# Altium PCB UARC_Sensor_Cedric.PcbDoc
Units mm, origin at the board's own origin, x right, y up, seen from the top; angles counter-clockwise.
Board outline 60.1 x 84.97 mm, 4 copper layers (Top Layer, GND Plane, PWR Plane, Bottom Layer), stack 1.495 mm thick; 89 components, 77 nets, 394 pads, 19 vias.
Unrouted connection lines stored in the file: 193.
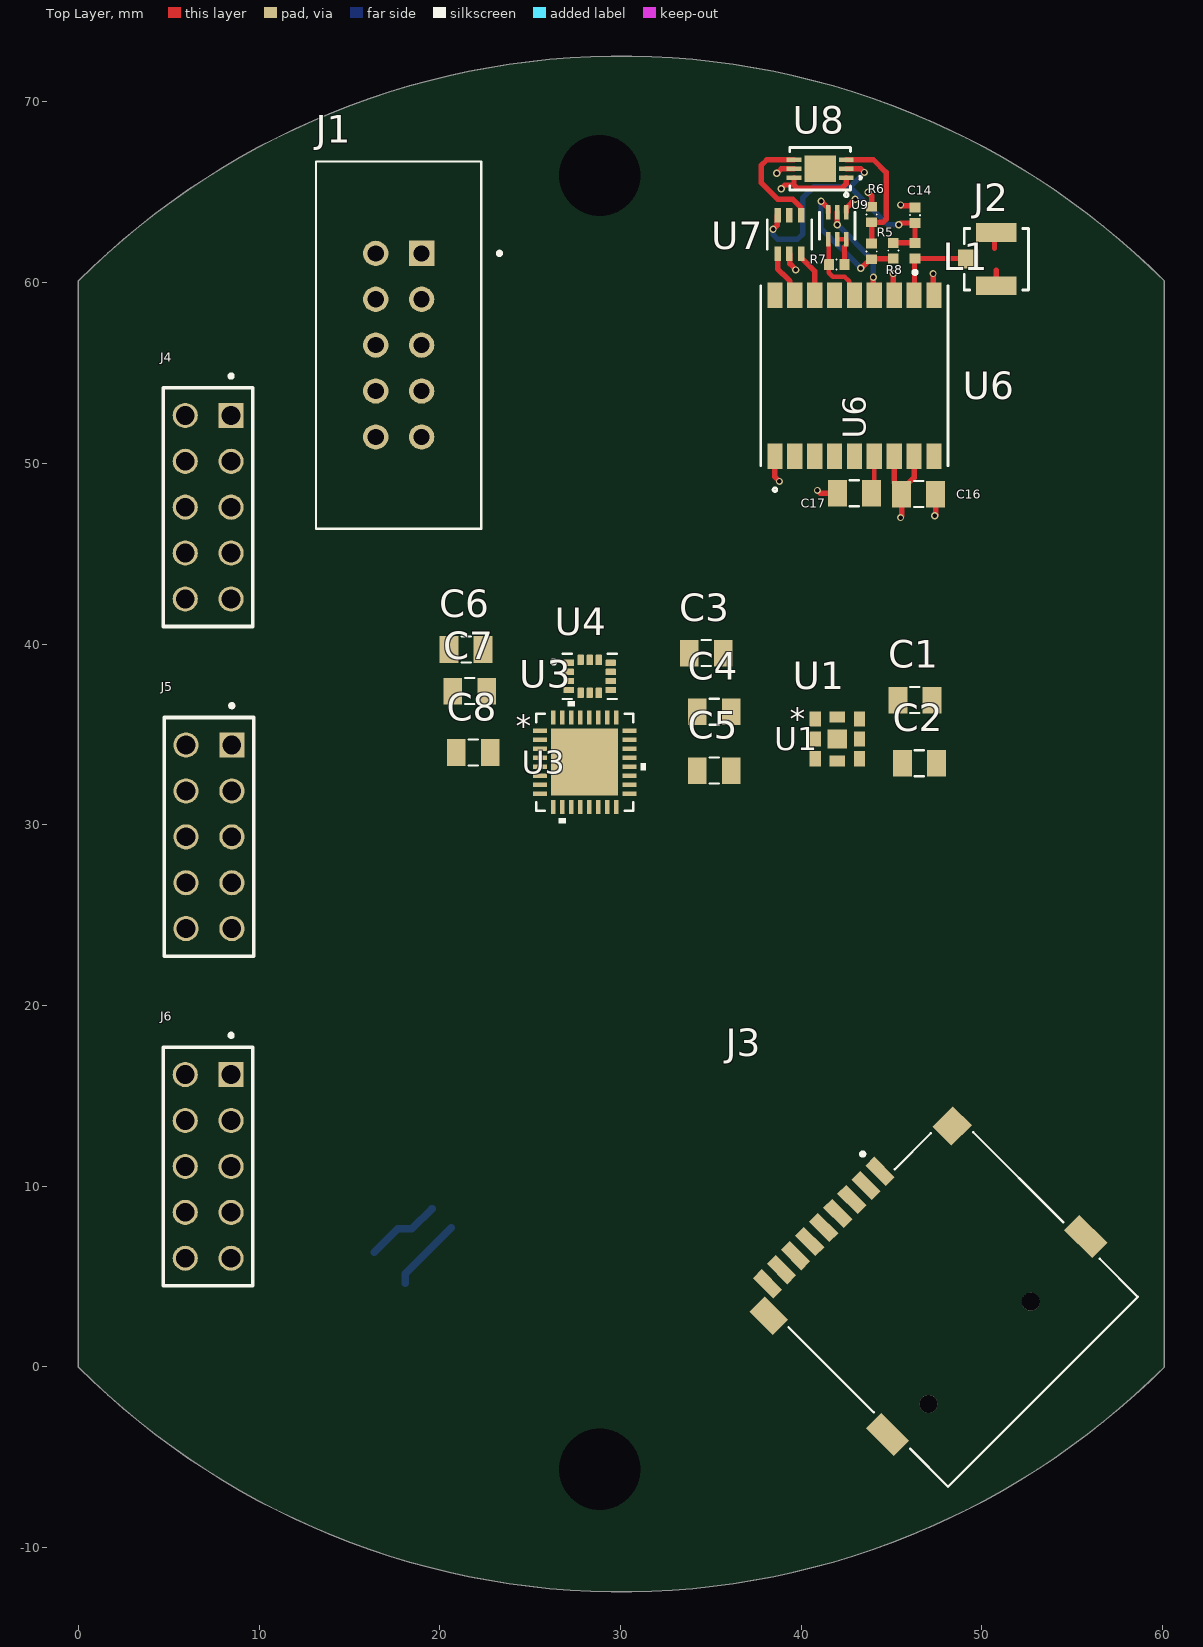
[diagram p0: Top Layer view]
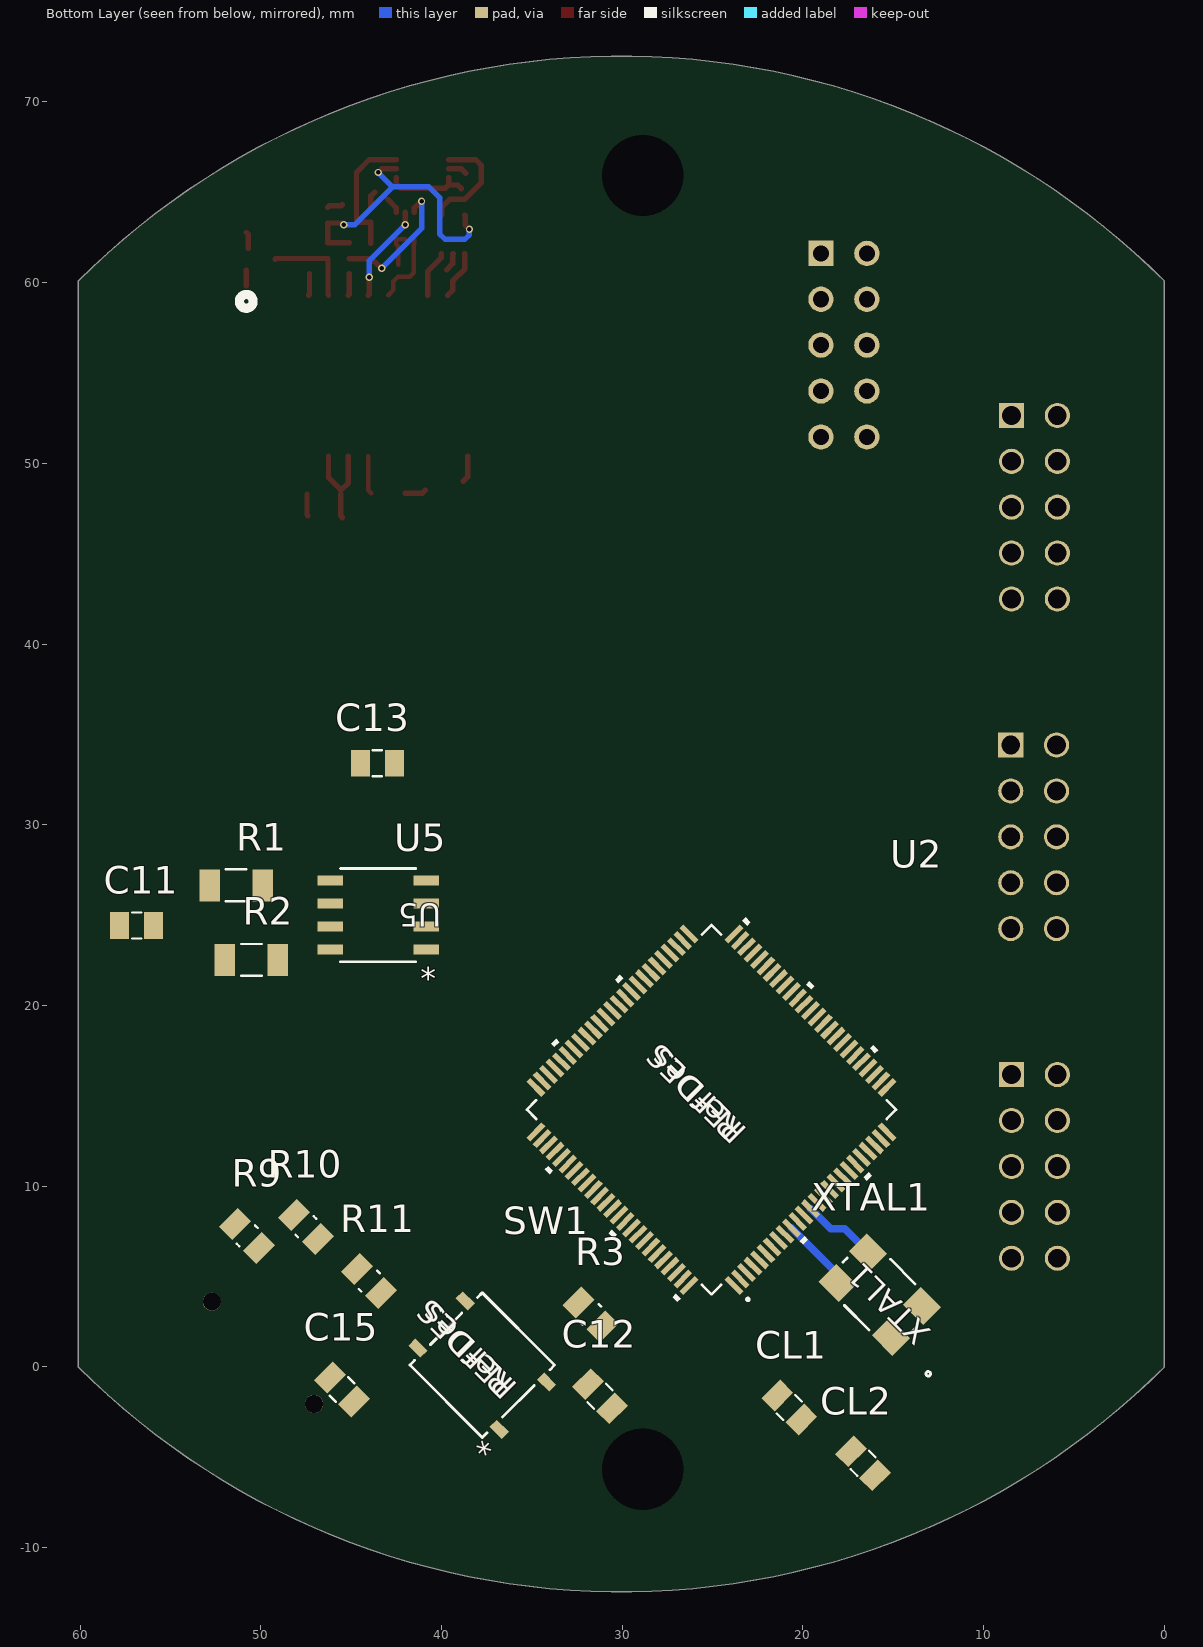
[diagram p1: Bottom Layer view, seen from below]
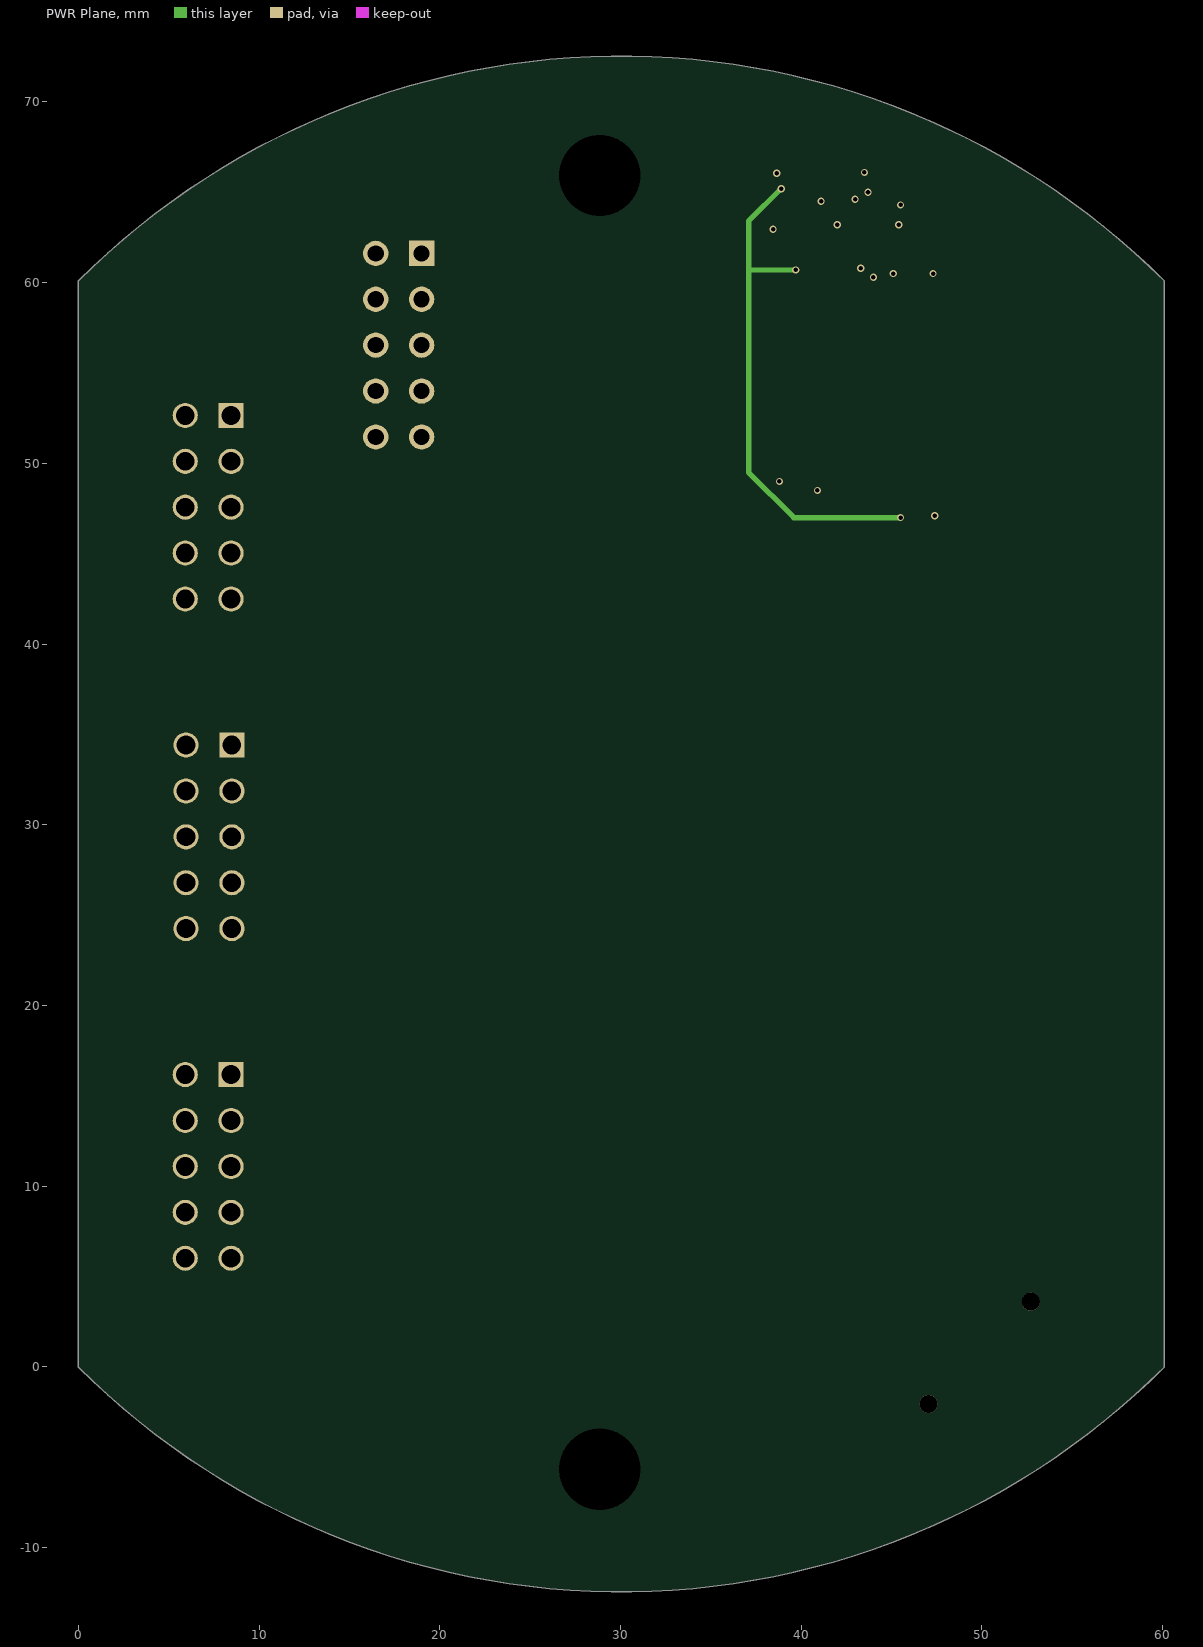
[diagram p2: PWR Plane]

## Layer stack, top to bottom
Top Solder: solder mask 0.0102, Solder Resist, Dk 3.5
Top Layer: signal copper 0.0875
Dielectric 2: prepreg 0.13, PP-017, Dk 4.45
Dielectric 4: prepreg 0.13, PP-017, Dk 4.45
GND Plane: signal copper 0.105
Core: core 0.59, Core-038, Dk 4.6
PWR Plane: signal copper 0.105
Dielectric 5: prepreg 0.13, PP-017, Dk 4.45
Dielectric 3: prepreg 0.13, PP-017, Dk 4.45
Bottom Layer: signal copper 0.0875
Bottom Solder: solder mask 0.0102, Solder Resist, Dk 3.5

## Board outline
-0.005,-0.001 ccw(c30.048,30.051) 60.1,-0.001 60.1,60.085 ccw(c30.047,30.033) -0.005,60.085

## Design rules (kind name [scope] priority, off if disabled: settings)
Clearance [All] p1: gap=0.2 ignorepadtopadclearanceinfootprint=FALSE
PolygonConnect [All] p1: connectstyle=Relief reliefconductorwidth=0.254 reliefentries=4 polygonreliefangle="90 Angle" airgapwidth=0.254
RoutingVias [All] p1: holewidth=0.711 width=1.27 viastyle="Through Hole" minholewidth=0.711 minwidth=1.27 maxholewidth=0.711 maxwidth=1.27
SolderMaskExpansion [All] p1: expansion=0.102 istentingtop=FALSE
SupplyNets "Schematic Supply Nets_33" [InNet('SWDIO')] p1: voltage=0.000
SupplyNets "Schematic Supply Nets_32" [InNet('OVP')] p2: voltage=0.000
SupplyNets "Schematic Supply Nets_31" [InNet('CS2')] p3: voltage=0.000
SupplyNets "Schematic Supply Nets_30" [InNet('SPI_MOSI')] p4: voltage=0.000
SupplyNets "Schematic Supply Nets_29" [InNet('GPIO1')] p5: voltage=0.000
SupplyNets "Schematic Supply Nets_28" [InNet('GPIO5')] p6: voltage=0.000
SupplyNets "Schematic Supply Nets_27" [InNet('USART2_RX')] p7: voltage=0.000
SupplyNets "Schematic Supply Nets_26" [InNet('5V')] p8: voltage=0.000
SupplyNets "Schematic Supply Nets_25" [InNet('OCP')] p9: voltage=0.000
SupplyNets "Schematic Supply Nets_24" [InNet('V_BCKP')] p10: voltage=0.000
SupplyNets "Schematic Supply Nets_23" [InNet('5V_ISO')] p11: voltage=0.000
SupplyNets "Schematic Supply Nets_22" [InNet('GND')] p12: voltage=0.000
SupplyNets "Schematic Supply Nets_21" [InNet('VDD')] p13: voltage=0.000
SupplyNets "Schematic Supply Nets_20" [InNet('I2C_SDA')] p14: voltage=0.000
SupplyNets "Schematic Supply Nets_19" [InNet('GPIO4')] p15: voltage=0.000
SupplyNets "Schematic Supply Nets_18" [InNet('SPI_MISO')] p16: voltage=0.000
SupplyNets "Schematic Supply Nets_17" [InNet('SWO')] p17: voltage=0.000
SupplyNets "Schematic Supply Nets_16" [InNet('SPI_CLK')] p18: voltage=0.000
SupplyNets "Schematic Supply Nets_15" [InNet('FIRE')] p19: voltage=0.000
SupplyNets "Schematic Supply Nets_14" [InNet('USART2_TX')] p20: voltage=0.000
SupplyNets "Schematic Supply Nets_13" [InNet('RESET')] p21: voltage=0.000
SupplyNets "Schematic Supply Nets_12" [InNet('ARM')] p22: voltage=0.000
SupplyNets "Schematic Supply Nets_11" [InNet('I2C_SCL')] p23: voltage=0.000
SupplyNets "Schematic Supply Nets_10" [InNet('GPIO6')] p24: voltage=0.000
SupplyNets "Schematic Supply Nets_9" [InNet('CS1')] p25: voltage=0.000
SupplyNets "Schematic Supply Nets_8" [InNet('USART1_RX')] p26: voltage=0.000
SupplyNets "Schematic Supply Nets_7" [InNet('GPIO3')] p27: voltage=0.000
SupplyNets "Schematic Supply Nets_6" [InNet('ERR')] p28: voltage=0.000
SupplyNets "Schematic Supply Nets_5" [InNet('GPIO2')] p29: voltage=0.000
SupplyNets "Schematic Supply Nets_4" [InNet('GPIO7')] p30: voltage=0.000
SupplyNets "Schematic Supply Nets_3" [InNet('SWDCLK')] p31: voltage=0.000
SupplyNets "Schematic Supply Nets_2" [InNet('GPIO0')] p32: voltage=0.000
SupplyNets "Schematic Supply Nets_1" [InNet('USART1_TX')] p33: voltage=0.000
SupplyNets "Schematic Supply Nets" [InNet('CS0')] p34: voltage=0.000
Width [All] p1: maxlimit=0.3 minlimit=0.2 preferedwidth=0.25
30 further rules are at their usual default settings.

## Components (designator, comment, footprint, x,y, rotation, side; value= is the part's Value field where it differs from the comment)
3V3 "Test Point" "Test Point Pad Large" 69.374,-35.825 r90 top
5V "Test Point" "Test Point Pad Large" 109.872,-28.25 r0 top
ACCL_CS "Test Point" "Test Point Pad Large" 70.038,-11.425 r90 top
BMP_CS "Test Point" "Test Point Pad Large" 77.817,-20.175 r90 top
BT "BK-912" BAT_BK-912 -20.25,25.75 r180 top
C1 "100nF" CAPACITOR_0805_2012M-70N 46.3,36.9 r0 top
C2 "100nF" CAPACITOR_0805_2012M-70N 46.544,33.406 r0 top
C3 "100nF" CAPACITOR_0805_2012M-70N 34.75,39.5 r0 top
C4 "100nF" CAPACITOR_0805_2012M-70N 35.19,36.25 r0 top
C5 "10uF" CAPACITOR_0805_2012M-70N 35.19,33 r0 top
C6 "10nF" CAPACITOR_0805_2012M-70N 21.46,39.7 r0 top
C7 "100nF" CAPACITOR_0805_2012M-70N 21.66,37.4 r0 top
C8 "2.2uF" CAPACITOR_0805_2012M-70N 21.86,34 r0 top
C9 "2.2uF" CAPACITOR_0805_2012M-70N 130.595,77.775 r0 top
C10 "2.2uF" CAPACITOR_0805_2012M-70N 130.988,74.177 r0 top
C11 "4.7nF" CAPACITOR_0805_2012M-70N 56.867,24.425 r0 bottom
C12 "100nF" CAPACITOR_0805_2012M-70N 31.227,-1.625 r45 bottom
C13 "100nF" CAPACITOR_0805_2012M-70N 43.542,33.4 r0 bottom
C14 "10nF" CAPACITOR_0402_1005M_55N 46.3,63.732 r270 top
C15 "100nF" CAPACITOR_0805_2012M-70N 45.5,-1.25 r45 bottom
C16 "100nF" CAPACITOR_0805_2012M-70N 46.5,48.3 r180 top
C17 "100nF" CAPACITOR_0805_2012M-70N 42.95,48.35 r0 top
C18 "100nF" CAPACITOR_0805_2012M-70N 123.545,99.25 r0 top
C19 "100nF" CAPACITOR_0805_2012M-70N 127.57,99.275 r0 top
C20 "100nF" CAPACITOR_0805_2012M-70N 130.645,99.275 r90 top
C21 "100nF" CAPACITOR_0805_2012M-70N 133.63,99.125 r0 top
C22 "100nF" CAPACITOR_0805_2012M-70N 122.57,94.675 r90 top
C23 "100nF" CAPACITOR_0805_2012M-70N 125.57,94.66 r90 top
C24 "4.7uF" CAPACITOR_0603_1608M_100N 129.045,94.516 r90 top
C25 "100nF" CAPACITOR_0805_2012M-70N 133.345,94.6 r90 top
C26 "1uF" CAPACITOR_0805_2012M-70N 125.37,79.075 r90 top
C27 "100nF" CAPACITOR_0805_2012M-70N 125.662,73.602 r90 top
CAN_H "Test Point" "Test Point Pad Large" 86.9,-35.825 r90 top
CAN_L "Test Point" "Test Point Pad Large" 121.323,-28.25 r90 top
CAN_RX "Test Point" "Test Point Pad Large" 81.946,-28.25 r90 top
CAN_TX "Test Point" "Test Point Pad Large" 88.243,-20.175 r90 top
CL1 "27pF" CAPACITOR_0805_2012M-70N 20.75,-2.25 r45 bottom
CL2 "27pF" CAPACITOR_0805_2012M-70N 16.665,-5.335 r45 bottom
D1 "SML-D12U1WT86" LED_SML-D12U1WT86 -61.78,-44.425 r0 top
D2 "SML-D12U1WT86" LED_SML-D12U1WT86 -49.23,-44.525 r0 top
D3 "SML-D12U1WT86" LED_SML-D12U1WT86 -36.03,-43.8 r0 top
D4 "SML-D12U1WT86" LED_SML-D12U1WT86 -22.055,-43.55 r0 top
D5 "SML-D12U1WT86" LED_SML-D12U1WT86 -9.08,-43.675 r0 top
GND "Test Point" "Test Point Pad Large" 69.22,-28.25 r90 top
GND1 "Test Point" "Test Point Pad Large" 70.967,-20.175 r90 top
GND2 "Test Point" "Test Point Pad Large" 81.964,-11.425 r90 top
GNSS_ANT_DETECT "Test Point" "Test Point Pad Large" 123.191,-11.425 r90 top
GNSS_GND "Test Point" "Test Point Pad Large" 98.668,-20.175 r90 top
GNSS_RX "Test Point" "Test Point Pad Large" 92.347,-28.25 r90 top
GNSS_TX "Test Point" "Test Point Pad Large" 130.198,-28.25 r90 top
IMU_CS "Test Point" "Test Point Pad Large" 113.04,-11.425 r90 top
J1 "103308-1" TE_103308-1 17.73,56.54 r270 top
J2 "RECE.20279.001E.01" CON3_RECE.20279.001E.01_TAL 50.8,61.3 r270 top
J3 "MSD-1-A" CUI_MSD-1-A 48.25,3.75 r45 top
J4 "SSW-105-02-G-D" SAMTEC_SSW-105-02-G-D 8.457,52.653 r90 top locked
J5 "SSW-105-02-G-D" SAMTEC_SSW-105-02-G-D 8.497,34.413 r90 top locked
J6 "SSW-105-02-G-D" SAMTEC_SSW-105-02-G-D 8.457,16.173 r90 top locked
L1 "27nH" INDC1005X55N 46.3,61.768 r270 top
MISO "Test Point" "Test Point Pad Large" 114.198,-28.25 r90 top
MOSI "Test Point" "Test Point Pad Large" 75.071,-28.25 r90 top
R1 "60" RESISTOR_1206_3216M_55N 51.362,26.65 r0 bottom
R2 "60" RESISTOR_1206_3216M_55N 50.517,22.525 r0 bottom
R3 "10k" Resistor_0805_2012M-50N 31.742,2.9 r45 bottom
R4 "10k" Resistor_0805_2012M-50N 144.535,49.175 r0 top
R5 "560" RESISTOR_0402_1005M_37N 43.9,61.732 r270 top
R6 "100k" RESISTOR_0402_1005M_37N 43.9,63.768 r270 top
R7 "100k" RESISTOR_0402_1005M_37N 41.968,61 r0 top
R8 "10" RESISTOR_0402_1005M_37N 45.1,61.768 r90 top
R9 "=Value" RESISTOR_0805_2012M-50N 50.75,7.25 r45 bottom
R10 "=Value" RESISTOR_0805_2012M-50N 47.5,7.75 r45 bottom
R11 "=Value" RESISTOR_0805_2012M-50N 44,4.75 r45 bottom
R12 "1k" Resistor_0805_2012M-50N -62.23,-41.075 r0 top
R13 "1k" Resistor_0805_2012M-50N -49.33,-40.15 r0 top
R14 "1k" Resistor_0805_2012M-50N -37.04,-40.2 r0 top
R15 "1k" Resistor_0805_2012M-50N -22.38,-40.325 r0 top
R16 "1k" Resistor_0805_2012M-50N -10.47,-39.825 r0 top
SPI_CLK "Test Point" "Test Point Pad Large" 75.2,-35.825 r90 top
SW1 "PTS526 SM15 SMTR2 LFS" "SON4_PTS526 SM15 SMTR2 LFS_CNK" 37.742,0.1 r45 bottom
U1 "BMP585" LGA9_BMP585_BOS 42,34.75 r0 top
U2 "STM32F407VGT7" LQFP100-14x14mm 25.055,14.234 r45 bottom
U3 "ADXL314WBCPZ-RL" LFCSP32_CP-32-17_ADI 28.023,33.46 r0 top
U4 "ICM-42370-P" PQFN50P250X300X81-14N 28.3,38.21 r0 top
U5 "MCP2557FD-H/SN" SOIC8_SN_MCH 43.5,25 r0 bottom
U6 "MAX-M10M-00B" MOD18_MAX-M10M_UBL 42.95,54.85 r90 top
U7 "NC7WZ07P6X" SC-88SC70-6SOT-363_419B-02_ONS 39.35,62.667 r270 top
U8 "LT6000CDCB#TRPBF" DFN-6_DCB_LIT 41.052,66.3 r180 top
U9 "SI1016X-T1-GE3" SOT_X-T1-GE3_VIS 42,63.149 r270 top
VCC_RF "Test Point" "Test Point Pad Large" 95.801,-35.825 r90 top
XTAL1 "FY0800018" "4xtal- 1-3xtal 2-4NC_DIO" 15.75,4 r45 bottom

## Footprints (in the part's own frame and the unit in brackets; to place one, negate y for a bottom-side part, rotate by r counter-clockwise, add the part's x,y. Pads: shape width x height; smd on the part's side, far side on the other; paste and mask are expansions set on the pad)
"4xtal- 1-3xtal 2-4NC_DIO" [mm]
  rect 1.6x1.397 smd paste-0.699 mask+0: 1(-2.1,1.2) 2(2.1,1.2) 3(2.1,-1.2) 4(-2.1,-1.2)
  silkscreen extent -5.13,-1.8 2.71,1.8, body extent -2.58,-1.68 2.58,1.68, height 0.79
BAT_BK-912 [mm]
  round 17.78 smd paste-10: 1(0,0)
  rect 2.79x5.08 smd: S1(-10.985,0) S1(10.985,0)
  silkscreen extent -10.54,-7.62 10.54,7.62
CAPACITOR_0402_1005M_55N [mm] "Capacitor, 0402 (1005 metric), 0.55mm height, nominal pads"
  rect 0.54x0.6 smd mask+0.051: 1(-0.432,0) 2(0.432,0)
  silkscreen extent -0.01,-0.28 0.01,0.28, body extent -0.5,-0.28 0.5,0.27, height 0.48
CAPACITOR_0603_1608M_100N [mm] "Capacitor, 0603 (1608 metric), 1mm high, nominal pads"
  rect 1x1.02 smd mask+0.051: 1(-0.759,0) 2(0.759,0)
  silkscreen extent -0.1,-0.5 0.1,0.5, body extent -0.8,-0.5 0.8,0.5, height 0.78
CAPACITOR_0805_2012M-70N [mm] "Capacitor, 0805 (2012 metric), 0.7mm high, nominal pads,"
  rect 1.04x1.47 smd mask+0.051: 1(-0.94,0) 2(0.94,0)
  silkscreen extent -0.25,-0.72 0.25,0.72, body extent -1,-0.73 1,0.73, height 1.23
CON3_RECE.20279.001E.01_TAL [mil]
  rect 41x45 smd paste+0 mask+0: 1(0,-61.02)
  rect 41x89 smd paste+0 mask+0: 2(58.07,0) 3(-58.07,0)
  silkscreen extent -67,-70 67,70
CUI_MSD-1-A [mm]
  rect 0.7x1.6 smd: 1(2.25,7.75) 2(1.15,7.75) 3(0.05,7.75) 4(-1.05,7.75) 5(-2.15,7.75) 6(-3.25,7.75) 7(-4.35,7.75) 8(-5.45,7.75) CD(-6.55,7.75)
  rect 1.2x1.8 smd: G1(-7.75,6.45)
  rect 1.6x1.5 smd: G2(6.85,6.7)
  rect 1.2x2.2 smd: G3(-7.75,-2.85) G4(7.75,-2.85)
  round 1 hole 1 unplated: ""(-4.95,-3.25) ""(3.05,-3.25)
  silkscreen extent -7.42,-7.25 7.42,9.2, body extent -8.28,-6.25 7.87,8.79, height 1.8
DFN-6_DCB_LIT [mil]
  rect 32x10 smd paste+0 mask+0: 1(-57,19.68) 2(-57,0) 3(-57,-19.69) 4(57,-19.69) 5(57,0) 6(57,19.68)
  rect 69x57 smd paste+0 mask+0: 7(0,0)
  silkscreen extent -90,-47 66,47, body extent -61,-41 61,41, height 32
INDC1005X55N [mm]
  rect 0.54x0.6 smd: 1(-0.432,0) 2(0.432,0)
  silkscreen extent 1.1,-0.1 1.3,0.1
LED_SML-D12U1WT86 [mm]
  rect 0.8x0.8 smd: A(0.825,0) C(-0.825,0)
  silkscreen extent -1.86,-0.4 0.11,0.4, body extent -0.8,-0.4 0.8,0.4, height 0.55
LFCSP32_CP-32-17_ADI [mil]
  rect 30x10 smd paste+0 mask+0: 1(-97.5,68.9) 2(-97.5,49.21) 3(-97.5,29.53) 4(-97.5,9.84) 5(-97.5,-9.84) 6(-97.5,-29.53) 7(-97.5,-49.21) 8(-97.5,-68.9) 17(97.5,-68.9) 18(97.5,-49.21) 19(97.5,-29.53) 20(97.5,-9.84) 21(97.5,9.84) 22(97.5,29.53) 23(97.5,49.21) 24(97.5,68.9)
  rect 10x30 smd paste+0 mask+0: 9(-68.9,-97.5) 10(-49.21,-97.5) 11(-29.53,-97.5) 12(-9.84,-97.5) 13(9.84,-97.5) 14(29.53,-97.5) 15(49.21,-97.5) 16(68.9,-97.5) 25(68.9,97.5) 26(49.21,97.5) 27(29.53,97.5) 28(9.84,97.5) 29(-9.84,97.5) 30(-29.53,97.5) 31(-49.21,97.5) 32(-68.9,97.5)
  rect 146x146 smd paste-73 mask+0: 33(0,0)
  silkscreen extent -106,-132 132,132, body extent -101,-101 101,101, height 61
LGA9_BMP585_BOS [mil]
  rect 24x33 smd paste+0 mask+0: 1(-48,43.31) 2(-48,0) 3(-48,-43.31) 5(48,-43.31) 6(48,0) 7(48,43.31)
  rect 33x24 smd paste+0 mask+0: 4(0,-48) 8(0,48)
  rect 42x42 smd paste+0 mask+0: 9(0,0)
  body extent -65,-65 65,65, height 77
LQFP100-14x14mm [mil]
  rect 47x12 smd paste+0 mask+0: 1(-305.12,236.22) 2(-305.12,216.54) 3(-305.12,196.85) 4(-305.12,177.17) 5(-305.12,157.48) 6(-305.12,137.8) 7(-305.12,118.11) 8(-305.12,98.43) 9(-305.12,78.74) 10(-305.12,59.06) 11(-305.12,39.37) 12(-305.12,19.69) 13(-305.12,0) 14(-305.12,-19.69) 15(-305.12,-39.37) 16(-305.12,-59.06) 17(-305.12,-78.74) 18(-305.12,-98.43) 19(-305.12,-118.11) 20(-305.12,-137.8) 21(-305.12,-157.48) 22(-305.12,-177.17) 23(-305.12,-196.85) 24(-305.12,-216.54) 25(-305.12,-236.22) 51(305.12,-236.22) 52(305.12,-216.54) 53(305.12,-196.85) 54(305.12,-177.17) 55(305.12,-157.48) 56(305.12,-137.8) 57(305.12,-118.11) 58(305.12,-98.43) 59(305.12,-78.74) 60(305.12,-59.06) 61(305.12,-39.37) 62(305.12,-19.69) 63(305.12,0) 64(305.12,19.69) 65(305.12,39.37) 66(305.12,59.06) 67(305.12,78.74) 68(305.12,98.43) 69(305.12,118.11) 70(305.12,137.8) 71(305.12,157.48) 72(305.12,177.17) 73(305.12,196.85) 74(305.12,216.54) 75(305.12,236.22)
  rect 12x47 smd paste+0 mask+0: 26(-236.22,-305.12) 27(-216.54,-305.12) 28(-196.85,-305.12) 29(-177.17,-305.12) 30(-157.48,-305.12) 31(-137.8,-305.12) 32(-118.11,-305.12) 33(-98.43,-305.12) 34(-78.74,-305.12) 35(-59.06,-305.12) 36(-39.37,-305.12) 37(-19.69,-305.12) 38(0,-305.12) 39(19.69,-305.12) 40(39.37,-305.12) 41(59.06,-305.12) 42(78.74,-305.12) 43(98.43,-305.12) 44(118.11,-305.12) 45(137.8,-305.12) 46(157.48,-305.12) 47(177.17,-305.12) 48(196.85,-305.12) 49(216.54,-305.12) 50(236.22,-305.12) 76(236.22,305.12) 77(216.54,305.12) 78(196.85,305.12) 79(177.17,305.12) 80(157.48,305.12) 81(137.8,305.12) 82(118.11,305.12) 83(98.43,305.12) 84(78.74,305.12) 85(59.06,305.12) 86(39.37,305.12) 87(19.69,305.12) 88(0,305.12) 89(-19.69,305.12) 90(-39.37,305.12) 91(-59.06,305.12) 92(-78.74,305.12) 93(-98.43,305.12) 94(-118.11,305.12) 95(-137.8,305.12) 96(-157.48,305.12) 97(-177.17,305.12) 98(-196.85,305.12) 99(-216.54,305.12) 100(-236.22,305.12)
  silkscreen extent -351,-349 349,349, body extent -315,-315 315,315, height 63
MOD18_MAX-M10M_UBL [mil]
  rect 55x33 smd paste+0 mask+0: 1(-175.5,173.23) 2(-175.5,129.92) 3(-175.5,86.61) 4(-175.5,43.31) 5(-175.5,0) 6(-175.5,-43.31) 7(-175.5,-86.61) 8(-175.5,-129.92) 9(-175.5,-173.23) 10(175.5,-173.23) 11(175.5,-129.92) 12(175.5,-86.61) 13(175.5,-43.31) 14(175.5,0) 15(175.5,43.31) 16(175.5,86.61) 17(175.5,129.92) 18(175.5,173.23)
  silkscreen extent -252,-204 196,204, body extent -191,-199 191,199, height 106
PQFN50P250X300X81-14N [mm]
  rrect14% 0.58x0.35 smd mask+0: 1(-1.16,0.75)
  rrect25% 0.58x0.35 smd mask+0: 2(-1.16,0.25) 3(-1.16,-0.25) 4(-1.16,-0.75) 8(1.16,-0.75) 9(1.16,-0.25) 10(1.16,0.25) 11(1.16,0.75)
  rrect25% 0.35x0.58 smd mask+0: 5(-0.5,-0.91) 6(0,-0.91) 7(0.5,-0.91) 12(0.5,0.91) 13(0,0.91) 14(-0.5,0.91)
  silkscreen extent -2.1,-1.25 1.5,1.25, body extent -1.5,-1.25 1.5,1.25, height 0.81
RESISTOR_0402_1005M_37N [mm] "Resistor, 0402 (1005 metric), 0.37mm height, nominal pads"
  rect 0.54x0.6 smd mask+0.051: 1(-0.432,0) 2(0.432,0)
  silkscreen extent -0.01,-0.28 0.01,0.28, body extent -0.5,-0.25 0.5,0.25, height 0.37
Resistor_0805_2012M-50N [mm] "Resistor, 0805 (2012 metric), nominal pads"
  rect 1.04x1.47 smd mask+0.051: 1(-0.94,0) 2(0.94,0)
  silkscreen extent -0.1,-0.72 0.1,0.72, body extent -1,-0.62 1,0.63, height 0.5
RESISTOR_0805_2012M-50N [mm] "Resistor, 0805 (2012 metric), nominal pads"
  rect 1.04x1.47 smd mask+0.051: 1(-0.94,0) 2(0.94,0)
  silkscreen extent -0.1,-0.72 0.1,0.72, body extent -1,-0.62 1,0.63, height 0.5
RESISTOR_1206_3216M_55N [mm]
  rect 1.13x1.77 smd mask+0.051: 1(-1.47,0) 2(1.47,0)
  silkscreen extent -0.58,-0.88 0.58,0.88, body extent -1.6,-0.8 1.6,0.8, height 0.65
SAMTEC_SSW-105-02-G-D [mm]
  rect 1.39x1.39 hole 1.04: 01(0,0)
  round 1.39 hole 1.04: 02(0,2.54) 03(-2.54,0) 04(-2.54,2.54) 05(-5.08,0) 06(-5.08,2.54) 07(-7.62,0) 08(-7.62,2.54) 09(-10.16,0) 10(-10.16,2.54)
  silkscreen extent -11.69,-1.21 2.27,3.75
SC-88SC70-6SOT-363_419B-02_ONS [mil]
  rect 31x14 smd paste+0 mask+0: 1(-42,25.59) 2(-42,0) 3(-42,-25.59) 4(42,-25.59) 5(42,0) 6(42,25.59)
  silkscreen extent -32,-49 32,49, body extent -44,-44 44,44, height 43
SOIC8_SN_MCH [mil]
  rect 55x22 smd paste+0 mask+0: 1(-104.5,75) 2(-104.5,25) 3(-104.5,-25) 4(-104.5,-75) 5(104.5,-75) 6(104.5,-25) 7(104.5,25) 8(104.5,75)
  silkscreen extent -82,-102 82,102, body extent -118,-96 118,96, height 69
"SON4_PTS526 SM15 SMTR2 LFS_CNK" [mm]
  rect 0.95x0.559 smd paste+0 mask+0: 1(-3.18,1.85) 2(-3.18,-1.85) 3(3.18,-1.85) 4(3.18,1.85)
  silkscreen extent -2.83,-2.83 2.83,2.83, body extent -3.3,-2.71 3.3,2.71, height 1.6
SOT_X-T1-GE3_VIS [mil]
  rect 32x10 smd paste+0 mask+0: 1(-29.5,19.69) 2(-29.5,0) 3(-29.5,-19.69) 4(29.5,-19.69) 5(29.5,0) 6(29.5,19.69)
  silkscreen extent -71,-39 30,39, body extent -34,-34 34,34, height 24
TE_103308-1 [mil]
  rect 55x55 hole 35: 1(-200,50)
  round 55 hole 35: 2(-100,50) 3(0,50) 4(100,50) 5(200,50) 6(-200,-50) 7(-100,-50) 8(0,-50) 9(100,-50) 10(200,-50)
  silkscreen extent -400,-180 400,223
"Test Point Pad Large" [mm] "Exposed copper pad, 1mm dia. Very easy to probe."
  round 1 smd paste-10 mask+0.051: 1(0,0)

## Part data
BT: "BATTERY RETAINER COIN 20MM SMD", Package=None, Availability=Unavailable, MF=MPD, MP=BK-912, Price=None, SnapEDA_Link=https://www.snapeda.com/parts/BK-912/Memory%20Protection%20Devices/view-part/4219672/?ref=snap
C1 C2 C3 C4 C7 C12 C15 C16 C17 C18 C19 C20 C21 C22 C23 C25 C27: library part GRM21BR61E226ME44L, "CUSTOM: 885012207016 0.1µF 0805 ±10% 10V X7R Ceramic Capacitor", Capacitance at Rated Voltage=10%, Package=0805, Rated Voltage=25V, Supplier 1 Part No.=490-GRM155R61J224KE01JCT-ND, Temp Range="-55°C ~ 85°C", Temperature Coefficient=X5R, Tolerance=±20%, APSS Standard Part="APSS Standard", MF Part No.=GRM21BR61E226ME44L, Supplier 1=Digikey
C5: library part GRM21BR61E226ME44L, "CUSTOM: TACR106K010XTA 10µF 0805 ±10% 10V Tantalum Capacitor", Capacitance at Rated Voltage=10%, Package=0805, Rated Voltage=25V, Supplier 1 Part No.=490-GRM155R61J224KE01JCT-ND, Temp Range="-55°C ~ 85°C", Temperature Coefficient=X5R, Tolerance=±20%, APSS Standard Part="APSS Standard", MF Part No.=GRM21BR61E226ME44L, Supplier 1=Digikey
C6: library part GRM21BR61E226ME44L, "CUSTOM: 885012207011, 10000pF 0805 ±10% 10 X7R  Ceramic Capacitor", Capacitance at Rated Voltage=10%, Package=0805, Rated Voltage=25V, Supplier 1 Part No.=490-GRM155R61J224KE01JCT-ND, Temp Range="-55°C ~ 85°C", Temperature Coefficient=X5R, Tolerance=±20%, APSS Standard Part="APSS Standard", MF Part No.=GRM21BR61E226ME44L, Supplier 1=Digikey
C8 C9 C10: library part GRM21BR61E226ME44L, "CUSTOM: GRM21BR71A225KA01L 2.2µF 0805 ±10% 10V X7R Ceramic Capacitor", Capacitance at Rated Voltage=10%, Package=0805, Rated Voltage=25V, Supplier 1 Part No.=490-GRM155R61J224KE01JCT-ND, Temp Range="-55°C ~ 85°C", Temperature Coefficient=X5R, Tolerance=±20%, APSS Standard Part="APSS Standard", MF Part No.=GRM21BR61E226ME44L, Supplier 1=Digikey
C11: library part GRM21BR61E226ME44L, "CUSTOM: CC0805KRX7R9BB472 4700pF 0805 ±10% 50V X7R Ceramic Capacitor", Capacitance at Rated Voltage=10%, Package=0805, Rated Voltage=25V, Supplier 1 Part No.=490-GRM155R61J224KE01JCT-ND, Temp Range="-55°C ~ 85°C", Temperature Coefficient=X5R, Tolerance=±20%, APSS Standard Part="APSS Standard", MF Part No.=GRM21BR61E226ME44L, Supplier 1=Digikey
C13: library part GRM21BR60J107ME15L, "CUSTOM: 885012207016 0.1µF 0805 ±10% 10V X7R Ceramic Capacitor", Capacitance at Rated Voltage=20%, Package=0805, Rated Voltage=6.3V, Supplier 1 Part No.=490-GRM155R61E225KE11JCT-ND, Temp Range="-55°C ~ 85°C", Temperature Coefficient=X5R, Tolerance=±20%, APSS Standard Part="APSS Standard", MF Part No.=GRM21BR60J107ME15L, Supplier 1=Digikey
C14: library part GRM155R61E225KE11J, "CUSTOM: GRM155R71C103KA01D, 10000pF 0402 ±10% 16V X7R Ceramic Capacitor", Capacitance at Rated Voltage=10%, Package=0402, Rated Voltage=25V, Supplier 1 Part No.=490-10749-1-ND, Temp Range="-55°C ~ 85°C", Temperature Coefficient=X5R, Tolerance=±10%, APSS Standard Part="APSS Standard", MF Part No.=GRM155R61E225KE11J, Supplier 1=Digikey
C24: library part GRM188Z71A106KA73D, "CUSTOM:  GRM188Z71A475KE15D 4.7µF 0603 ±10% 10V X7R Ceramic Capacitor", Capacitance at Rated Voltage=20%, Package=0603, Rated Voltage=10V, Supplier 1 Part No.=490-5313-1-ND, Temp Range="-55°C ~ 125°C", Temperature Coefficient=X7R, Tolerance=±10%, APSS Standard Part="APSS Standard", MF Part No.=GRM188Z71A106KA73D, Supplier 1=Digikey
C26: library part GRM21BR61E226ME44L, "CUSTOM: 0805ZC105KAT2A 1µF 0805 ±10% 10V X7R  Ceramic Capacitor", Capacitance at Rated Voltage=10%, Package=0805, Rated Voltage=25V, Supplier 1 Part No.=490-GRM155R61J224KE01JCT-ND, Temp Range="-55°C ~ 85°C", Temperature Coefficient=X5R, Tolerance=±20%, APSS Standard Part="APSS Standard", MF Part No.=GRM21BR61E226ME44L, Supplier 1=Digikey
CL1 CL2: library part GRM21BR61E226ME44L, "CUSTOM: 600F270JT250XT4K 27pF 0805 ±5% 250V C0G, NP0 Ceramic Capacitor", Capacitance at Rated Voltage=10%, Package=0805, Rated Voltage=25V, Supplier 1 Part No.=490-GRM155R61J224KE01JCT-ND, Temp Range="-55°C ~ 85°C", Temperature Coefficient=X5R, Tolerance=±20%, APSS Standard Part="APSS Standard", MF Part No.=GRM21BR61E226ME44L, Supplier 1=Digikey
D1 D2 D3 D4 D5: "Red 620nm LED Indication - Discrete 2.2V 0603 (1608 Metric)", Package="0603 Rohm", Availability="In Stock", Check_prices=https://www.snapeda.com/parts/SML-D12U1WT86/Rohm/view-part/?ref=eda, MF=Rohm, MP=SML-D12U1WT86, Price=None, Purchase-URL=https://pricing.snapeda.com/search?q=SML-D12U1WT86&ref=eda, SnapEDA_Link=https://www.snapeda.com/parts/SML-D12U1WT86/Rohm/view-part/?ref=snap
J1: "Header;  Pin;  Vertical;  Copper Alloy;  Thermoplastic;  10;  0.100 x 0.100 in.;  1 A", Package=None, Availability=Unavailable, MF="TE Connectivity", MP=103308-1, Price=None, SnapEDA_Link=https://www.snapeda.com/parts/103308-1/TE%20Connectivity%20AMP%20Connectors/view-part/519501/?ref=snap
J2: "No Description Available", Manufacturer_Name="Taoglas Limited", Copyright="Copyright (C) 2025 Ultra Librarian. All rights reserved.", Digi-Key_Part_Number_1=931-1107-1-ND, Digi-Key_Part_Number_2=931-1107-6-ND, Digi-Key_Part_Number_3=931-1107-2-ND, Manufacturer_Part_Number=RECE.20279.001E.01, RefDes=RefDes, Type="Coaxial Connectors(RF) Assemblies"
J3: "Micro SD Card Connector, 9 Positions, Connector and Ejector, Push In, Auto Eject Out, Surface Mount, 1.8 mm Height Above Board, Gold Flash", Package=None, Check_prices=https://www.snapeda.com/parts/MSD-1-A/Same+Sky/view-part/?ref=eda, MF="Same Sky", MP=MSD-1-A, SnapEDA_Link=https://www.snapeda.com/parts/MSD-1-A/Same+Sky/view-part/?ref=snap
J4 J5 J6: Package=None, Availability=Unavailable, MF="Samtec Inc.", MP=SSW-105-02-G-D, Price=None
L1: library part LQG15HH27NJ02D, "LQG15HN2N2S02D 27nH 0402  Unshielded Multilayer Inductor 350 mA 460mOhm Max", Package=None, Availability=Unavailable, MP=LQG15HH27NJ02D, Price=None
R1 R2: library part "TNPW1206xxxxDE Series", "CUSTOM: CRCW120660R0KNEAIF 60 Ohms 1206  ±10% 0.25W, 1/4W Chip Resistor,", Package=0805, Power=0.52W, Rated Voltage=200V, Temp Range="-55°C ~ 155°C", Temperature Coefficient=±200ppm/°C, Tolerance=0.5%, Value Range="1R ~ 2M", E Series=E24+E96, Supplier 1=Digikey
R3 R4: library part "RMCF0805JT Series", "CUSTOM: CRCW080510K0FKEA 10 kOhms 0805  ±1% 0.25W, 1/4W Chip Resistor", Package=0805, Power=1/8W, Rated Voltage=150V, Temp Range="-55°C ~ 155°C", Temperature Coefficient=±200ppm/°C, Tolerance=5%, Value Range="100m ~ 22M", APSS Standard Part="APSS Standard", E Series=E24, Supplier 1=Digikey
R5: library part "RMCF0402JT Series", "CUSTOM: ERJ-2GEJ561X 560 Ohms 0402  ±5% 0.1W, 1/10W Chip Resistor", Package=0402, Power=1/16W, Rated Voltage=50V, Temp Range="-55°C ~ 155°C", Temperature Coefficient=±100ppm/°C, Tolerance=5%, Value Range="1 ~ 20M", APSS Standard Part="APSS Standard", E Series=E24, Supplier 1=Digikey
R6 R7: library part "RMCF0402JT Series", "CUSTOM: RK73B1ETTP104J 100 kOhms 0402 ±5% 0.1W, 1/10W Chip Resistor", Package=0402, Power=1/16W, Rated Voltage=50V, Temp Range="-55°C ~ 155°C", Temperature Coefficient=±100ppm/°C, Tolerance=5%, Value Range="1 ~ 20M", APSS Standard Part="APSS Standard", E Series=E24, Supplier 1=Digikey
R8: library part "RMCF0402JT Series", "CUSTOM: SG73P1EWTTP100J 10 Ohms 0402 ±5% 0.25W, 1/4W Chip Resistor", Package=0402, Power=1/16W, Rated Voltage=50V, Temp Range="-55°C ~ 155°C", Temperature Coefficient=±100ppm/°C, Tolerance=5%, Value Range="1 ~ 20M", APSS Standard Part="APSS Standard", E Series=E24, Supplier 1=Digikey
R9 R10 R11: library part "Generic Resistor", "CUSTOM: CRCW080510K0FKEA 10 kOhms 0805  ±1% 0.25W, 1/4W Chip Resistor", Tolerance=?%
R12 R13 R14 R15 R16: library part "RMCF0805JT Series", "CUSTOM: CRCW08051K00FKEA 1 kOhms 0805 ±1% 0.25W, 1/4W Chip Resistor", Package=0805, Power=1/8W, Rated Voltage=150V, Temp Range="-55°C ~ 155°C", Temperature Coefficient=±200ppm/°C, Tolerance=5%, Value Range="100m ~ 22M", APSS Standard Part="APSS Standard", E Series=E24, Supplier 1=Digikey
SW1: "Description", Manufacturer_Name="C&K Components", Copyright="Copyright (C) 2025 Ultra Librarian. All rights reserved.", Manufacturer_Part_Number="PTS526 SM15 SMTR2 LFS", RefDes=RefDes, Type=Type
U1: "No Description Available", Manufacturer_Name="Bosch Sensortec", Copyright="Copyright (C) 2025 Ultra Librarian. All rights reserved.", Digi-Key_Part_Number_1=828-BMP585TR-ND, Digi-Key_Part_Number_2=828-BMP585CT-ND, Digi-Key_Part_Number_3=828-BMP585DKR-ND, Manufacturer_Part_Number=BMP585, RefDes=RefDes, Type="Pressure Sensors, Transducers"
U2: "High-performance foundation line, Arm Cortex-M4 core with DSP and FPU, 1 Mbyte of Flash memory, 168 MHz CPU, ART Accelerator, Ethernet, FSMC", Manufacturer_Name=STMicroelectronics, Copyright="Copyright (C) 2025 Ultra Librarian. All rights reserved.", Manufacturer_Part_Number=STM32F407VGT7, RefDes=RefDes, Type=Type
U3: "Â±200 g Range, 3-Axis Digital Accelerometer", Manufacturer_Name="Analog Devices Inc", Copyright="Copyright (C) 2025 Ultra Librarian. All rights reserved.", Manufacturer_Part_Number=ADXL314WBCPZ-RL, RefDes=RefDes, Type=Type
U4: "Accelerometer X, Y, Z Axis 2g, 4g, 8g, 16g 14-LGA (2.5x3)", Package=None, Check_prices=https://www.snapeda.com/parts/ICM-42370-P/InvenSense/view-part/?ref=eda, MF=InvenSense, MP=ICM-42370-P, SnapEDA_Link=https://www.snapeda.com/parts/ICM-42370-P/InvenSense/view-part/?ref=snap
U5: library part MCP2557FD-HSN, "No Description Available", Manufacturer_Name=Microchip, Copyright="Copyright (C) 2025 Ultra Librarian. All rights reserved.", Digi-Key_Part_Number_1=MCP2557FD-H/SN-ND, Manufacturer_Part_Number=MCP2557FD-H/SN, RefDes=RefDes, Type=Type
U6: "No Description Available", Manufacturer_Name=Ublox, Copyright="Copyright (C) 2025 Ultra Librarian. All rights reserved.", Digi-Key_Part_Number_1=672-MAX-M10M-00BTR-ND, Digi-Key_Part_Number_2=672-MAX-M10M-00BCT-ND, Digi-Key_Part_Number_3=672-MAX-M10M-00BDKR-ND, Manufacturer_Part_Number=MAX-M10M-00B, RefDes=RefDes, Type=RF
U7: "Description", Manufacturer_Name=onsemi, Copyright="Copyright (C) 2025 Ultra Librarian. All rights reserved.", Manufacturer_Part_Number=NC7WZ07P6X, RefDes=RefDes, Type=Type
U8: library part LT6000CDCBTRPBF, "Single 1.8V, 13ÂµA Precision Rail-to-Rail Op Amp", Manufacturer_Name="Analog Devices Inc", Copyright="Copyright (C) 2025 Ultra Librarian. All rights reserved.", Datasheet=https://www.analog.com/media/en/technical-documentation/data-sheets/600012fa.pdf, Digi-Key_Part_Number_1=505-LT6000CDCB#TRPBFCT-ND, Digi-Key_Part_Number_2=505-LT6000CDCB#TRPBFDKR-ND, Digi-Key_Part_Number_3=505-LT6000CDCB#TRPBFTR-ND, Digi-Key_Part_Number_4=LT6000CDCB#TRPBF-ND, Manufacturer_Part_Number=LT6000CDCB#TRPBF, RefDes=RefDes, Type=Type
U9: "COMPLEMENTARY N & P-CH 20-V (D-S) MOSFET", Manufacturer_Name=Vishay, Copyright="Copyright (C) 2025 Ultra Librarian. All rights reserved.", Datasheet=https://www.vishay.com/doc?71168, Digi-Key_Part_Number_1=SI1016X-T1-GE3TR-ND, Digi-Key_Part_Number_2=SI1016X-T1-GE3CT-ND, Digi-Key_Part_Number_3=SI1016X-T1-GE3DKR-ND, Manufacturer_Part_Number=SI1016X-T1-GE3, RefDes=RefDes, Type=Type
XTAL1: "No Description Available", Manufacturer_Name="Diodes Inc", Copyright="Copyright (C) 2025 Ultra Librarian. All rights reserved.", Manufacturer_Part_Number=FY0800018, RefDes=RefDes, Type=Type

## Free pads (board coordinates)
  round 0 hole 4.5 unplated: 1(28.857,-5.667) 1(28.857,65.933)

## Via types
v1: diameter 0.4, hole 0.25, Top Layer to PWR Plane, 12 vias
v2: diameter 0.4, hole 0.25, Top Layer to Bottom Layer, 7 vias

## Nets (pads, with @x,y where several pads share a name; then routed paths per layer and width w, separated by ;. In a path a pad name is that pad's centre, name@x,y a point inside that pad or via, vN(x,y) a via of type N, cw(c..) or ccw(c..) an arc to the next point about the centre after c; other vN are vias at no path point)
5V: 5V.1 C13.2 J6.10 U5.3
5V_ISO: J6.08
ACCL_CS: ACCL_CS.1 U2.25 U3.6
ACCL_INT1: U2.17 U3.20
ACCL_INT2: U2.18 U3.21
ANT_DETECT: GNSS_ANT_DETECT.1 U6.16 U7.6 | length 2.6
  Top Layer w0.3: U7.6 40,61.384 40.75,60.634 U6.16
ANT_OFF_N: U6.13 U9.2 | length 5.4
  Top Layer w0.3: v2(42,63.206) U9.2 ; v2(44,60.3) 44,59.358 U6.13
  Bottom Layer w0.3: v2(42,63.206) 44,61.206 v2(44,60.3)
ANT_SHORT_N: U6.17 U7.4 | length 2.7
  Top Layer w0.3: U7.4 38.7,60.756 39.003,60.454 39.017,60.454 39.381,60.089 39.381,59.577 U6.17
ANT_SIGNAL: J2.1 L1.2 U6.11 | length 5
  Top Layer w0.3: U6.11 46.275,59.333 46.275,61.311 L1.2 49.164,61.336 J2.1@49.2,61.3
ARM: J6.03
BMP_CS: BMP_CS.1 U1.7 U2.29
BMP_INT: U1.5 U2.16
CAN_H: CAN_H.1 R1.2 U5.7
CAN_L: CAN_L.1 R2.1 U5.6
CAN_LED: R16.2 U2.3
CAN_RX: CAN_RX.1 U2.81 U5.4
CAN_TX: CAN_TX.1 U2.82 U5.1
CS0: J4.02
CS1: J4.08
CS2: J4.07
ERR: J6.04
ERROR_LED: R14.2 U2.1
FIRE: J6.05
GND: BT.1 C1.1 C2.2 C3.2 C4.2 C5.2 C6.2 C7.2 C8.2 C9.2 C10.2 C11.2 C12.2 C13.1 C14.1 C15.1 C16.1 C17.1 C18.2 C19.2 C20.2 C21.2 C22.2 C23.2 C24.1 C25.2 C26.2 C27.2 CL1.2 CL2.2 D1.C D2.C D3.C D4.C D5.C GND1.1 GND2.1 GND.1 GNSS_GND.1 J1.3 J1.5 J1.9 J2.2 J2.3 J3.6 J3.G1 J3.G2 J3.G3 J3.G4 J6.07 J6.09 R4.1 R6.1 SW1.4 U1.6 U2.10 U2.20 U2.27 U2.74 U2.99 U3.1 U3.3 U3.4 U3.33 U4.6 U4.7 U5.2 U5.8 U6.1 U6.10 U6.12 U7.2 U8.5 U9.1 XTAL1.2 XTAL1.4 | length 15.9
  Top Layer w0.3: U6.1 38.55,49.25 v1(38.8,49) ; v1(38.65,66.05) 38.9,66.3 U8.5 ; v1(40.9,48.5) 41.05,48.35 C17.1 ; U9.1 42.5,64.132 v1(42.984,64.616) ; v1(43.7,65) 43.9,64.8 R6.1 ; v1(45.1,60.5) 45.1,59.358 U6.12 ; v1(45.5,64.3) 45.55,64.25 46.214,64.25 C14.1 ; v1(47.3,60.5) 47.3,59.358 U6.10 ; v1(47.4,47.1) 47.44,47.14 C16.1 ; 50.7,61.9 50.7,62.675 J2.3 ; J2.2 50.8,60.7
  Bottom Layer w0.42: XTAL1.2 18.083,5.141 U2.10
GNSS_LED: R15.2 U2.2
GNSS_RX: GNSS_RX.1 U2.83 U6.2
GNSS_TX: GNSS_TX.1 U2.80 U6.3
GPIO0: J5.10
GPIO1: J5.09
GPIO2: J5.08
GPIO3: J5.07
GPIO4: J5.06
GPIO5: J5.05
GPIO6: J5.04
GPIO7: J5.03
HB_LED: R13.2 U2.98
I2C_SCL: J4.03
I2C_SDA: J4.04
IMU_CS: IMU_CS.1 U2.26 U4.12
IMU_INT1: U2.33 U4.4
IMU_INT2: U2.34 U4.9
MISO: MISO.1 U1.3 U2.31 U3.23 U4.1
MOSI: MOSI.1 U1.2 U2.32 U3.24 U4.14
NetC9_1: C9.1 C10.1 U2.49 U2.73
NetC11_1: C11.1 R1.1 R2.2
NetD1_A: D1.A R12.1
NetD2_A: D2.A R13.1
NetD3_A: D3.A R14.1
NetD4_A: D4.A R15.1
NetD5_A: D5.A R16.1
OCP: J6.01
OSC_IN: CL1.1 U2.12 XTAL1.1
OSC_OUT: CL2.1 U2.13 XTAL1.3 | length 4.2
  Bottom Layer w0.42: XTAL1.3 17.689,7.636 18.457,7.636 U2.13
OUT: U7.1 U8.4 | length 6.1
  Top Layer w0.3: U8.4 38.1,66.8 37.8,66.5 37.8,65.522 38.7,64.622 39.528,64.622 39.972,64.178 39.972,63.761 U7.1
OVP: J6.02
RESET: C12.1 J1.10 R3.1 SW1.1 U2.14
SD_CLK: J3.5 U2.52
SD_CS: J3.2 R11.2 U2.51
SD_MISO: J3.7 R10.2 U2.53
SD_MOSI: J3.3 R9.2 U2.54
SPI_CLK: J4.01 SPI_CLK.1 U1.1 U2.30 U3.26 U4.13
SPI_MISO: J4.05
SPI_MOSI: J4.06
SWDCLK: J1.4 U2.76
SWDIO: J1.2 U2.72
SWO: J1.6 U2.89
T1_DRAIN: R5.2 R8.1 U9.3 | length 7.4
  Top Layer w0.3: v2(41.1,64.5) 41.132,64.5 41.5,64.132 U9.3 ; v2(43.3,60.8) 43.319,60.819 43.352,60.819 43.713,61.18 43.78,61.18 R5.2 ; R5.2@43.918,61.318 45.082,61.318 R8.1
  Bottom Layer w0.3: v2(41.1,64.5) 41.1,63 v2(43.3,60.8)
T2_DRAIN: R7.2 U9.5 U9.6 | length 1.9
  Top Layer w0.25: U9.5 U9.6 42.5,62.121 42.4,62.021 R7.2
USART1_RX: J5.01
USART1_TX: J5.02
USART2_RX: J4.09
USART2_TX: J4.10
V+: R5.1 R6.2 U8.3 | length 7.1
  Top Layer w0.3: U8.3 44,66.8 44.7,66.1 44.7,63.512 44.524,63.336 R6.2 R5.1
V-: C14.2 L1.1 R8.2 U7.3 U8.2 | length 16.9
  Top Layer w0.3: v2(38.45,62.95) 38.672,63.172 38.672,63.706 U7.3 ; U8.2 43.3,66.3 v2(43.5,66.1) ; R8.2 L1.1 C14.2 45.5,63.3 v2(45.4,63.2)
  Bottom Layer w0.3: v2(38.45,62.95) 38.46,62.94 38.46,62.64 38.7,62.4 39.8,62.4 40.1,62.7 40.1,64.7 40.7,65.3 42.7,65.3 ; v2(43.5,66.1) 42.7,65.3 ; v2(45.4,63.2) 44.8,63.2 42.7,65.3
V_BCKP: BT.S1 C17.2 U6.6 | length 2.1
  Top Layer w0.25: C17.2 44.05,48.51 U6.6
VCC_RF: R7.1 U6.14 U9.4 VCC_RF.1 | length 4.1
  Top Layer w0.25: U9.4 41.5,62.121 41.536,62.084 R7.1 41.536,60.546 41.751,60.331 42.404,60.331 42.656,60.079 42.656,59.602 U6.14
VDD: 3V3.1 C1.2 C2.1 C3.1 C4.1 C5.1 C6.1 C7.1 C8.1 C15.2 C16.2 C18.1 C19.1 C20.1 C21.1 C22.1 C23.1 C24.2 C25.1 C26.1 C27.1 J1.1 J3.4 J6.06 R3.2 R4.2 R9.1 R10.1 R11.1 R12.2 U1.4 U1.8 U2.6 U2.11 U2.19 U2.21 U2.22 U2.28 U2.50 U2.75 U2.94 U2.100 U3.5 U3.31 U4.5 U4.8 U6.7 U6.8 U7.5 U8.1 U8.6 | length 39.6
  Top Layer w0.3: v1(38.9,65.2) 39.102,65.402 39.604,65.402 ; U7.5 39.378,61.572 39.378,61.049 39.7,60.727 v1(39.7,60.7) ; U8.6 39.604,65.402 ; U8.1 42.5,65.476 42.25,65.226 39.78,65.226 39.604,65.402 ; U6.7 45.15,48.925 45.56,48.515 46.25,49.205 U6.8 ; v1(45.5,47) 45.5,47.027 45.56,47.087 C16.2
  PWR Plane w0.3: v1(38.9,65.2) 37.1,63.4 37.1,60.7 ; v1(39.7,60.7) 37.1,60.7 ; v1(45.5,47) 39.6,47 37.1,49.5 37.1,60.7
pads on no net: J1.7 J1.8 J3. J3.1 J3.8 J3.CD SW1.2 SW1.3 U1.9 U2.4 U2.5 U2.7 U2.8 U2.9 U2.15 U2.23 U2.24 U2.35 U2.36 U2.37 U2.38 U2.39 U2.40 U2.41 U2.42 U2.43 U2.44 U2.45 U2.46 U2.47 U2.48 U2.55 U2.56 U2.57 U2.58 U2.59 U2.60 U2.61 U2.62 U2.63 U2.64 U2.65 U2.66 U2.67 U2.68 U2.69 U2.70 U2.71 U2.77 U2.78 U2.79 U2.84 U2.85 U2.86 U2.87 U2.88 U2.90 U2.91 U2.92 U2.93 U2.95 U2.96 U2.97 U3.2 U3.7 U3.8 U3.9 U3.10 U3.11 U3.12 U3.13 U3.14 U3.15 U3.16 U3.17 U3.18 U3.19 U3.22 U3.25 U3.27 U3.28 U3.29 U3.30 U3.32 U4.2 U4.3 U4.10 U4.11 U5.5 U6.4 U6.5 U6.9 U6.15 U6.18 U8.7

## Text inside footprints (layer, text, board x,y; h text height)
SW1: Mechanical 13 "RefDes2" at 35.722,-1.023 h1.27 r225; Mechanical 13 "*" at 36.835,-2.729 h1.27 r225; Bottom Overlay "RefDes" at 35.946,-0.798 h1.27 r225; Bottom Overlay "*" at 36.703,-4.166 h1.27 r225; Bottom Overlay "REFDES" at 35.722,-1.023 h1.27 r225
U1: Top Overlay "*" at 39.371,35.215 h1.27; Mechanical 13 "*" at 41.555,35.215 h1.27
U2: Mechanical 13 "RefDes2" at 23.035,13.112 h1.27 r225; Bottom Overlay "RefDes" at 23.259,13.336 h1.27 r225; Bottom Overlay "REFDES" at 23.035,13.112 h1.27 r225
U3: Top Overlay "*" at 24.213,34.825 h1.27; Mechanical 13 "*" at 25.61,34.825 h1.27
U5: Mechanical 13 "*" at 41.608,23.895 h1.27 r180; Bottom Overlay "*" at 40.274,22.663 h1.27 r180
U7: Mechanical 13 "*" at 39.109,63.276 h1.27 r270